# EAGLE board DCCoupler_Low_Pressure_Short_v2 (EAGLE 9.6.2)
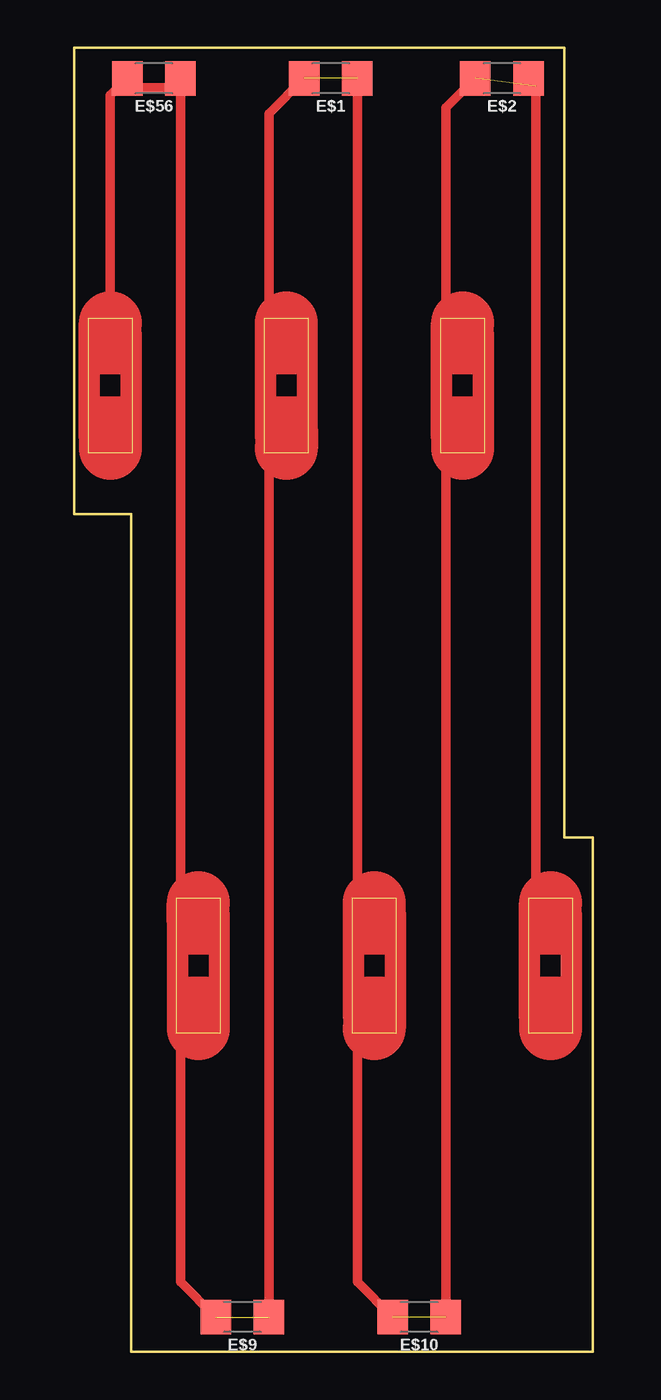
[diagram p0: board, top side]

Size 27.27 x 68.58 mm. Coordinates in mm from the lower left corner, seen from the top.
Outline: 25.78,68.58 0,68.58 0,44.06 3,44.06 3,0 27.27,0 27.27,27.06 25.78,27.06 25.78,68.58
Copper layers (1*16): Top 0.035mm / dielectric 1.5mm / Bottom 0.035mm
Design rules "default": minimum track width 10mil, minimum drill 24mil, track to track 8mil, track to pad 8mil, pad to pad 8mil, via to via 8mil, smd to smd 8mil, copper to edge 40mil, drill to drill 8mil, minimum pad ring 10mil, minimum via ring 8mil, stop-mask expansion 4mil, vias tented up to drill 0mil, thermal gap 10mil
Milling: 8 lines

## Footprints (pad centres in the part's own frame; a part is rotated, then mirrored left to right if it is on the bottom)
1206 = smd 1.6 x 1.8: 1 -1.4,0; 2 1.4,0

## Placement (x,y rotation side)
E$1  [1206]  13.49,66.96 180 top
E$2  [1206]  22.49,66.96 180 top
E$9  [1206]  8.84,1.84 180 top
E$10  [1206]  18.14,1.84 180 top
E$56  [1206]  4.19,66.96 180 top
S$1  [GAAEXTENSIONS_LP]  11.16,50.81 90 top
S$2  [GAAEXTENSIONS_LP]  1.9,50.81 90 top
S$3  [GAAEXTENSIONS_LP]  6.53,20.31 90 top
S$4  [GAAEXTENSIONS_LP]  20.42,50.81 90 top
S$11  [GAAEXTENSIONS_LP]  15.79,20.31 90 top
S$12  [GAAEXTENSIONS_LP]  25.05,20.31 90 top

## Library data of the parts
E$1 E$2 E$9 E$10 E$56 = SparkFun-Resistors
S$1-S$4 S$11 S$12 = CouplerDC_v2

## Nets
S$1: E$1.1 E$1.2 E$2.1 E$2.2 E$9.1 E$9.2 E$10.1 E$10.2 E$56.1 E$56.2

## Tracks (layer width: path | path; a pad name or v marks a point on that pad's centre or on a via)
S$1  (4 unrouted)
  Top 0.508: 1.9,54.86 1.9,66.06 E$56.2 2.8,66.46 5.09,66.46 E$56.1 5.59,3.69 E$9.2 | E$9.1 10.24,65.11 E$1.2 | E$1.1 14.89,3.69 E$10.2 | E$10.1 19.55,65.41 E$2.2 | E$2.1 24.3,66.56 24.3,24.49